# Altium PCB PCB_ECG_Multi_Lead.PcbDoc
Units mil, origin at the board's own origin, x right, y up, seen from the top; angles counter-clockwise.
Board outline 2755.91 x 2362.2 mil, 2 copper layers (Top Layer, Bottom Layer); 218 components, 117 nets, 623 pads, 0 vias.
Unrouted connection lines stored in the file: 460.
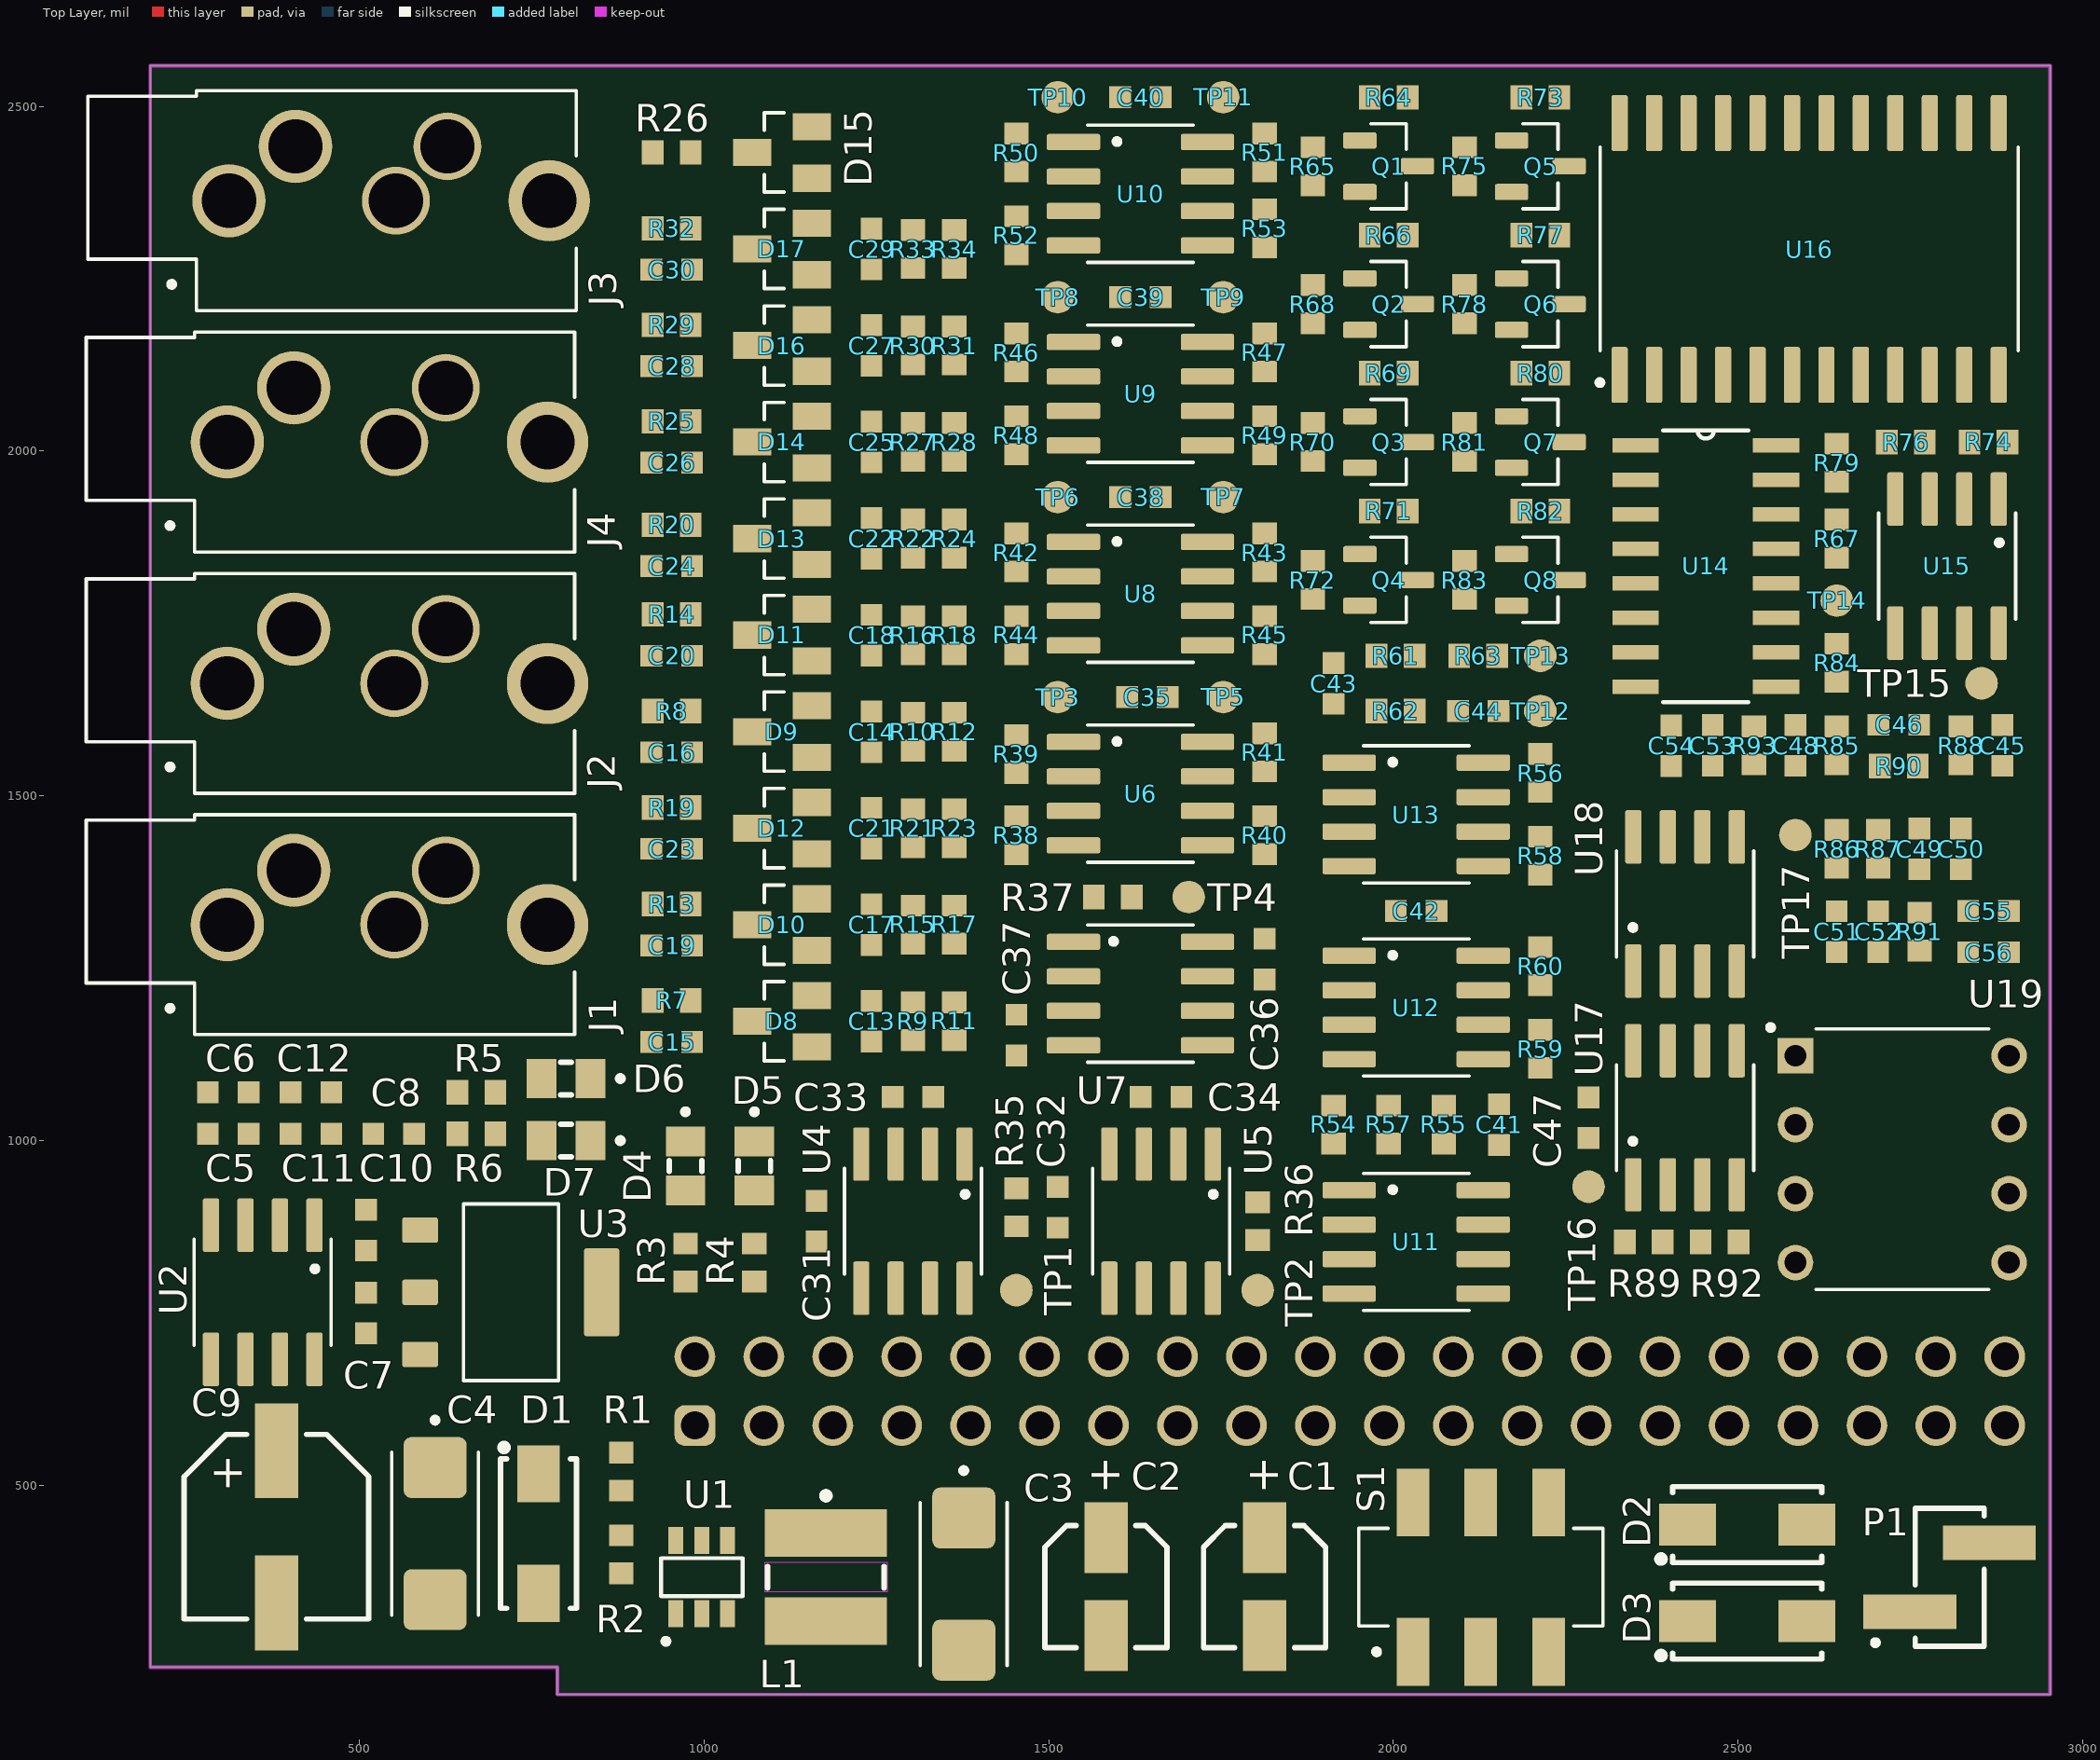
[diagram p0: Top Layer view]
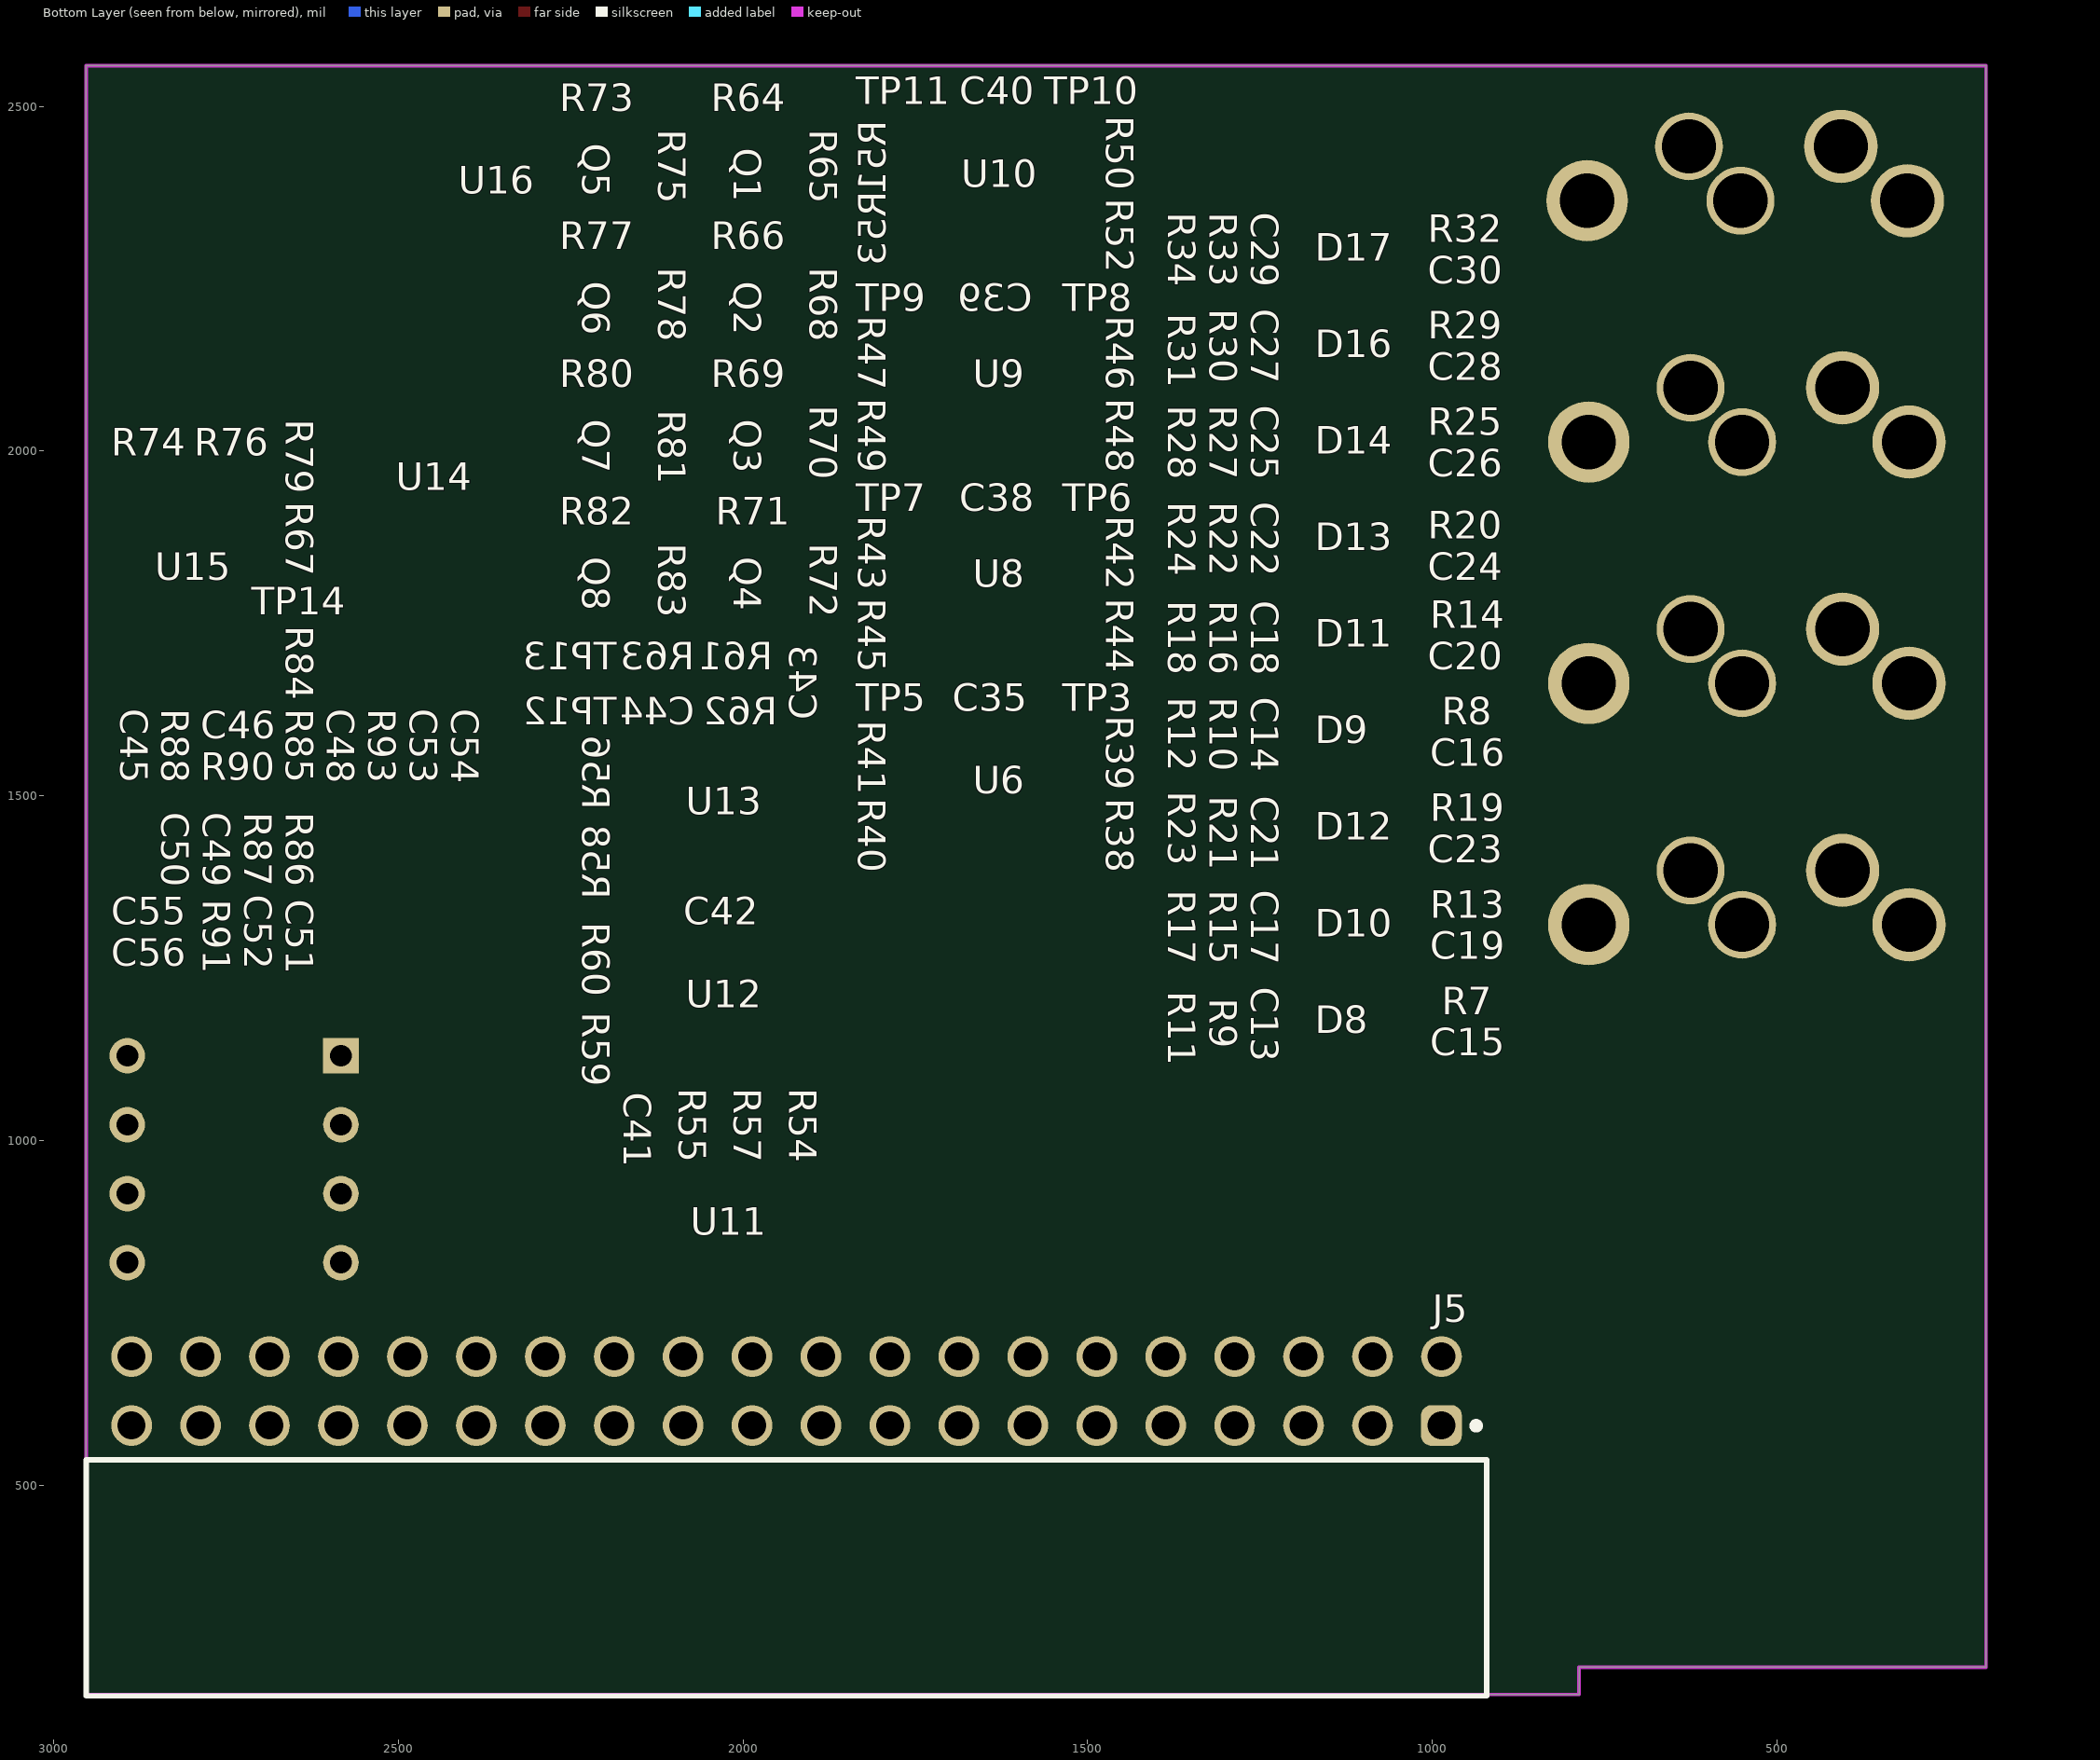
[diagram p1: Bottom Layer view, seen from below]

## Layer stack, top to bottom
Top Solder: solder mask 0.4, Solder Resist, Dk 3.5
Top Layer: signal copper 1.4
Dielectric 1: dielectric 12.6, FR-4, Dk 4.8
Bottom Layer: signal copper 1.4
Bottom Solder: solder mask 0.4, Solder Resist, Dk 3.5

## Board outline
196.85,236.22 196.85,2559.06 2952.76,2559.06 2952.76,196.85 787.4,196.85 787.4,236.22

## Design rules (kind name [scope] priority, off if disabled: settings)
Clearance [All] p1: gap=10 ignorepadtopadclearanceinfootprint=FALSE
PolygonConnect [All] p1: connectstyle=Relief reliefconductorwidth=10 reliefentries=4 polygonreliefangle="90 Angle" airgapwidth=10
RoutingVias [All] p1: holewidth=28 width=50 viastyle="Through Hole" minholewidth=28 minwidth=50 maxholewidth=28 maxwidth=50
SolderMaskExpansion [All] p1: expansion=4 istentingtop=FALSE
SupplyNets "Schematic Supply Nets_5" [InNet('3V5')] p1: voltage=0.000
SupplyNets "Schematic Supply Nets_4" [InNet('GND')] p2: voltage=0.000
SupplyNets "Schematic Supply Nets_2" [InNet('V_POW')] p3: voltage=0.000
SupplyNets "Schematic Supply Nets_1" [InNet('7V')] p4: voltage=0.000
SupplyNets "Schematic Supply Nets" [InNet('3V3')] p5: voltage=0.000
Width [All] p1: maxlimit=10 minlimit=10 preferedwidth=10
30 further rules are at their usual default settings.

## Classes and differential pairs
component class Designator: C13 C14 C15 C16 C17 C18 C19 C20 C21 C22 C23 C24 C25 C26 C27 C28 C29 C30 D8 D9 D10 D11 D12 D13 D14 D15 D16 D17 J1 J2 J3 J4 R7 R8 R9 R10 R11 R12 R13 R14 R15 R16 R17 R18 R19 R20 R21 R22 R23 R24 R25 R26 R27 R28 R29 R30 R31 R32 R33 R34

## Components (designator, comment, footprint, x,y, rotation, side; value= is the part's Value field where it differs from the comment)
C1 "10uF" WCAP-ASLI_D4H5.5 1813.15,353.15 r90 top
C2 "0.1uF" WCAP-ASLI_D4H5.5 1583.15,353.15 r90 top
C3 "10uF" CAPPM6032X280N 1376.85,356.85 r270 top
C4 "10uF" CAPPM6032X280N 610,430 r270 top
C5 "100nF" WCAP-CSGP_0603_L1.6W0.8H0.8_Reflow 310,1010 r180 top
C6 "10uF" WCAP-CSGP_0603_L1.6W0.8H0.8_Reflow 310,1070 r180 top
C7 "10uF" WCAP-CSGP_0603_L1.6W0.8H0.8_Reflow 510,750 r270 top
C8 "10uF" WCAP-CSGP_0603_L1.6W0.8H0.8_Reflow 550,1010 r0 top
C9 "220uF" WCAP-ASLI_D6.3H7.7 380,440 r90 top
C10 "1uF" WCAP-CSGP_0603_L1.6W0.8H0.8_Reflow 510,870 r270 top
C11 "100nF" WCAP-CSGP_0603_L1.6W0.8H0.8_Reflow 430,1010 r180 top
C12 "10uF" WCAP-CSGP_0603_L1.6W0.8H0.8_Reflow 430,1070 r180 top
C13 "4.7uF" WCAP-CSGP_0603_L1.6W0.8H0.8_Reflow 1243.15,1173.15 r90 top
C14 "4.7uF" WCAP-CSGP_0603_L1.6W0.8H0.8_Reflow 1243.15,1592.68 r90 top
C15 "1nF" WCAP-CSGP_0603_L1.6W0.8H0.8_Reflow 953.15,1143.15 r180 top
C16 "1nF" WCAP-CSGP_0603_L1.6W0.8H0.8_Reflow 953.15,1563.15 r180 top
C17 "4.7uF" WCAP-CSGP_0603_L1.6W0.8H0.8_Reflow 1243.15,1313.15 r90 top
C18 "4.7uF" WCAP-CSGP_0603_L1.6W0.8H0.8_Reflow 1243.15,1733.15 r90 top
C19 "1nF" WCAP-CSGP_0603_L1.6W0.8H0.8_Reflow 953.15,1283.15 r180 top
C20 "1nF" WCAP-CSGP_0603_L1.6W0.8H0.8_Reflow 953.15,1703.15 r180 top
C21 "4.7uF" WCAP-CSGP_0603_L1.6W0.8H0.8_Reflow 1243.15,1453.15 r90 top
C22 "4.7uF" WCAP-CSGP_0603_L1.6W0.8H0.8_Reflow 1243.15,1873.15 r90 top
C23 "1nF" WCAP-CSGP_0603_L1.6W0.8H0.8_Reflow 953.15,1423.15 r180 top
C24 "1nF" WCAP-CSGP_0603_L1.6W0.8H0.8_Reflow 953.15,1833.15 r180 top
C25 "4.7uF" WCAP-CSGP_0603_L1.6W0.8H0.8_Reflow 1243.15,2013.15 r90 top
C26 "1nF" WCAP-CSGP_0603_L1.6W0.8H0.8_Reflow 953.15,1983.15 r180 top
C27 "4.7uF" WCAP-CSGP_0603_L1.6W0.8H0.8_Reflow 1243.15,2153.15 r90 top
C28 "1nF" WCAP-CSGP_0603_L1.6W0.8H0.8_Reflow 953.15,2123.15 r180 top
C29 "4.7uF" WCAP-CSGP_0603_L1.6W0.8H0.8_Reflow 1243.15,2293.15 r90 top
C30 "1nF" WCAP-CSGP_0603_L1.6W0.8H0.8_Reflow 953.15,2263.15 r180 top
C31 "100nF" WCAP-CSGP_0603_L1.6W0.8H0.8_Reflow 1163.15,883.15 r90 top
C32 "100nF" WCAP-CSGP_0603_L1.6W0.8H0.8_Reflow 1513.15,903.15 r90 top
C33 "47nF" WCAP-CSGP_0603_L1.6W0.8H0.8_Reflow 1303.15,1063.15 r180 top
C34 "47nF" WCAP-CSGP_0603_L1.6W0.8H0.8_Reflow 1663.15,1063.15 r180 top
C35 "100nF" WCAP-CSGP_0603_L1.6W0.8H0.8_Reflow 1643.15,1643.15 r180 top
C36 "100nF" WCAP-CSGP_0603_L1.6W0.8H0.8_Reflow 1813.15,1263.15 r270 top
C37 "47nF" WCAP-CSGP_0603_L1.6W0.8H0.8_Reflow 1453.15,1153.15 r270 top
C38 "100nF" WCAP-CSGP_0603_L1.6W0.8H0.8_Reflow 1633.15,1933.15 r0 top
C39 "100nF" WCAP-CSGP_0603_L1.6W0.8H0.8_Reflow 1633.15,2223.15 r0 top
C40 "100nF" WCAP-CSGP_0603_L1.6W0.8H0.8_Reflow 1633.15,2513.15 r0 top
C41 "100nF" WCAP-CSGP_0603_L1.6W0.8H0.8_Reflow 2153.15,1023.15 r270 top
C42 "100nF" WCAP-CSGP_0603_L1.6W0.8H0.8_Reflow 2033.15,1333.15 r0 top
C43 "10nF" WCAP-CSGP_0603_L1.6W0.8H0.8_Reflow 1913.15,1663.15 r270 top
C44 "100nF" WCAP-CSGP_0603_L1.6W0.8H0.8_Reflow 2123.15,1623.15 r0 top
C45 "100nF" WCAP-CSGP_0603_L1.6W0.8H0.8_Reflow 2883.15,1573.15 r90 top
C46 "100nF" WCAP-CSGP_0603_L1.6W0.8H0.8_Reflow 2733.15,1603.15 r180 top
C47 "100nF" WCAP-CSGP_0603_L1.6W0.8H0.8_Reflow 2283.15,1033.15 r90 top
C48 "100nF" WCAP-CSGP_0603_L1.6W0.8H0.8_Reflow 2583.15,1573.15 r270 top
C49 "1uF" WCAP-CSGP_0603_L1.6W0.8H0.8_Reflow 2763.15,1423.15 r90 top
C50 "1uF" WCAP-CSGP_0603_L1.6W0.8H0.8_Reflow 2823.15,1423.15 r90 top
C51 "1uF" WCAP-CSGP_0603_L1.6W0.8H0.8_Reflow 2643.15,1303.15 r90 top
C52 "1uF" WCAP-CSGP_0603_L1.6W0.8H0.8_Reflow 2703.15,1303.15 r270 top
C53 "10uF" WCAP-CSGP_0603_L1.6W0.8H0.8_Reflow 2463.15,1573.15 r270 top
C54 "100nF" WCAP-CSGP_0603_L1.6W0.8H0.8_Reflow 2403.15,1572.68 r270 top
C55 "100nF" WCAP-CSGP_0603_L1.6W0.8H0.8_Reflow 2863.15,1333.15 r0 top
C56 "10uF" WCAP-CSGP_0603_L1.6W0.8H0.8_Reflow 2863.15,1273.15 r0 top
D1 "DSchottky" PCBComponent_1 760,430 r90 top
D2 "DSchottky" PCBComponent_1 2513.15,443.15 r180 top
D3 "DSchottky" PCBComponent_1 2513.15,303.15 r180 top
D4 "SML-LXT0805IW-TR" LEDC2012X120N 973.15,963.15 r270 top
D5 "SML-LXT0805IW-TR" LEDC2012X120N 1073.15,963.15 r270 top
D6 "SML-LXT0805IW-TR" LEDC2012X120N 800,1090 r180 top
D7 "SML-LXT0805IW-TR" LEDC2012X120N 800,1000 r180 top
D8 "KDS226" DIO_BAV99 1113.15,1173.15 r180 top
D9 "KDS226" DIO_BAV99 1113.15,1593.15 r180 top
D10 "KDS226" DIO_BAV99 1113.15,1313.15 r180 top
D11 "KDS226" DIO_BAV99 1113.15,1733.15 r180 top
D12 "KDS226" DIO_BAV99 1113.15,1453.15 r180 top
D13 "KDS226" DIO_BAV99 1113.15,1873.15 r180 top
D14 "KDS226" DIO_BAV99 1113.15,2013.15 r180 top
D15 "KDS226" DIO_BAV99 1113.15,2433.15 r180 top
D16 "KDS226" DIO_BAV99 1113.15,2153.15 r180 top
D17 "KDS226" DIO_BAV99 1113.15,2293.15 r180 top
J1 "PJ-324" "3.5 mm, Strereo" 308.58,1313.15 r0 top value=PJ-325
J2 "PJ-324" "3.5 mm, Strereo" 308.58,1663.15 r0 top value=PJ-325
J3 "PJ-324" "3.5 mm, Strereo" 311.02,2363.15 r0 top value=PJ-325
J4 "PJ-324" "3.5 mm, Strereo" 308.58,2013.15 r0 top value=PJ-325
J5 "613040243121" 613040243121 1936.85,365.98 r0 bottom
L1 "3.3uH" WE-PD2A_4532 1176.85,366.85 r270 top
P1 "TSM-102-01-X-SV" SAMTEC_TSM-102-01-X-SV 2806.85,366.85 r270 top
Q1 "BSS138" SOT95P240X111-3N 1993.15,2413.15 r0 top
Q2 "BSS138" SOT95P240X111-3N 1993.15,2213.15 r0 top
Q3 "BSS138" SOT95P240X111-3N 1993.15,2013.15 r0 top
Q4 "BSS138" SOT95P240X111-3N 1993.15,1813.15 r0 top
Q5 "BSS138" SOT95P240X111-3N 2213.15,2413.15 r0 top
Q6 "BSS138" SOT95P240X111-3N 2213.15,2213.15 r0 top
Q7 "BSS138" SOT95P240X111-3N 2213.15,2013.15 r0 top
Q8 "BSS138" SOT95P240X111-3N 2213.15,1813.15 r0 top
R1 "820k" WRIS-PSMB_0603_L1.6W0.8H0.35 880,520 r90 top
R2 "75k" WRIS-PSMB_0603_L1.6W0.8H0.35 880,400 r90 top
R3 "1k" WRIS-PSMB_0603_L1.6W0.8H0.35 973.15,823.15 r270 top
R4 "1k" WRIS-PSMB_0603_L1.6W0.8H0.35 1073.15,823.15 r270 top
R5 "1k" WRIS-PSMB_0603_L1.6W0.8H0.35 670,1070 r180 top
R6 "1k" WRIS-PSMB_0603_L1.6W0.8H0.35 670,1010 r180 top
R7 "220k" WRIS-PSMB_0603_L1.6W0.8H0.35 953.15,1203.15 r180 top
R8 "220k" WRIS-PSMB_0603_L1.6W0.8H0.35 953.15,1623.15 r180 top
R9 "1M" WRIS-PSMB_0603_L1.6W0.8H0.35 1303.15,1173.15 r270 top
R10 "1M" WRIS-PSMB_0603_L1.6W0.8H0.35 1303.15,1593.15 r270 top
R11 "1M" WRIS-PSMB_0603_L1.6W0.8H0.35 1363.15,1173.15 r90 top
R12 "1M" WRIS-PSMB_0603_L1.6W0.8H0.35 1363.15,1593.15 r90 top
R13 "220k" WRIS-PSMB_0603_L1.6W0.8H0.35 953.15,1343.15 r180 top
R14 "220k" WRIS-PSMB_0603_L1.6W0.8H0.35 953.15,1763.15 r180 top
R15 "1M" WRIS-PSMB_0603_L1.6W0.8H0.35 1303.15,1313.15 r270 top
R16 "1M" WRIS-PSMB_0603_L1.6W0.8H0.35 1303.15,1733.15 r270 top
R17 "1M" WRIS-PSMB_0603_L1.6W0.8H0.35 1363.15,1313.15 r90 top
R18 "1M" WRIS-PSMB_0603_L1.6W0.8H0.35 1363.15,1733.15 r90 top
R19 "220k" WRIS-PSMB_0603_L1.6W0.8H0.35 953.15,1483.15 r180 top
R20 "220k" WRIS-PSMB_0603_L1.6W0.8H0.35 953.15,1893.15 r180 top
R21 "1M" WRIS-PSMB_0603_L1.6W0.8H0.35 1303.15,1453.15 r270 top
R22 "1M" WRIS-PSMB_0603_L1.6W0.8H0.35 1303.15,1873.15 r270 top
R23 "1M" WRIS-PSMB_0603_L1.6W0.8H0.35 1363.15,1453.15 r90 top
R24 "1M" WRIS-PSMB_0603_L1.6W0.8H0.35 1363.15,1873.15 r90 top
R25 "220k" WRIS-PSMB_0603_L1.6W0.8H0.35 953.15,2043.15 r180 top
R26 "220k" WRIS-PSMB_0603_L1.6W0.8H0.35 953.15,2433.15 r180 top
R27 "1M" WRIS-PSMB_0603_L1.6W0.8H0.35 1303.15,2013.15 r270 top
R28 "1M" WRIS-PSMB_0603_L1.6W0.8H0.35 1363.15,2013.15 r90 top
R29 "220k" WRIS-PSMB_0603_L1.6W0.8H0.35 953.15,2183.15 r180 top
R30 "1M" WRIS-PSMB_0603_L1.6W0.8H0.35 1303.15,2153.15 r270 top
R31 "1M" WRIS-PSMB_0603_L1.6W0.8H0.35 1363.15,2153.15 r90 top
R32 "220k" WRIS-PSMB_0603_L1.6W0.8H0.35 953.15,2323.15 r180 top
R33 "1M" WRIS-PSMB_0603_L1.6W0.8H0.35 1303.15,2293.15 r270 top
R34 "1M" WRIS-PSMB_0603_L1.6W0.8H0.35 1363.15,2293.15 r90 top
R35 "2k" WRIS-PSMB_0603_L1.6W0.8H0.35 1453.15,903.15 r270 top
R36 "2k" WRIS-PSMB_0603_L1.6W0.8H0.35 1803.15,883.15 r270 top
R37 "2k" WRIS-PSMB_0603_L1.6W0.8H0.35 1593.15,1353.15 r0 top
R38 "50k" WRIS-PSMB_0603_L1.6W0.8H0.35 1453.15,1443.15 r90 top
R39 "100k" WRIS-PSMB_0603_L1.6W0.8H0.35 1453.15,1560.71 r90 top
R40 "50k" WRIS-PSMB_0603_L1.6W0.8H0.35 1813.15,1443.15 r90 top
R41 "100k" WRIS-PSMB_0603_L1.6W0.8H0.35 1813.15,1563.15 r90 top
R42 "100k" WRIS-PSMB_0603_L1.6W0.8H0.35 1453.15,1853.15 r90 top
R43 "100k" WRIS-PSMB_0603_L1.6W0.8H0.35 1813.15,1853.15 r90 top
R44 "2k" WRIS-PSMB_0603_L1.6W0.8H0.35 1453.15,1733.15 r90 top
R45 "2k" WRIS-PSMB_0603_L1.6W0.8H0.35 1813.15,1733.15 r90 top
R46 "100k" WRIS-PSMB_0603_L1.6W0.8H0.35 1453.15,2143.15 r90 top
R47 "100k" WRIS-PSMB_0603_L1.6W0.8H0.35 1813.15,2143.15 r90 top
R48 "2k" WRIS-PSMB_0603_L1.6W0.8H0.35 1453.15,2023.15 r90 top
R49 "2k" WRIS-PSMB_0603_L1.6W0.8H0.35 1813.15,2023.15 r90 top
R50 "100k" WRIS-PSMB_0603_L1.6W0.8H0.35 1453.15,2433.15 r90 top
R51 "100k" WRIS-PSMB_0603_L1.6W0.8H0.35 1813.15,2433.15 r90 top
R52 "2k" WRIS-PSMB_0603_L1.6W0.8H0.35 1453.15,2313.15 r90 top
R53 "2k" WRIS-PSMB_0603_L1.6W0.8H0.35 1813.15,2323.15 r90 top
R54 "100k" WRIS-PSMB_0603_L1.6W0.8H0.35 1913.15,1023.15 r90 top
R55 "100k" WRIS-PSMB_0603_L1.6W0.8H0.35 2073.15,1023.15 r90 top
R56 "100k" WRIS-PSMB_0603_L1.6W0.8H0.35 2213.15,1533.15 r90 top
R57 "100k" WRIS-PSMB_0603_L1.6W0.8H0.35 1993.15,1023.15 r270 top
R58 "20k" WRIS-PSMB_0603_L1.6W0.8H0.35 2213.15,1413.15 r90 top
R59 "20k" WRIS-PSMB_0603_L1.6W0.8H0.35 2213.15,1133.15 r90 top
R60 "180k" WRIS-PSMB_0603_L1.6W0.8H0.35 2213.15,1253.15 r90 top
R61 "10k" WRIS-PSMB_0603_L1.6W0.8H0.35 2003.15,1703.15 r180 top
R62 "1M" WRIS-PSMB_0603_L1.6W0.8H0.35 2003.15,1623.15 r180 top
R63 "120k" WRIS-PSMB_0603_L1.6W0.8H0.35 2123.15,1703.15 r0 top
R64 "10k" WRIS-PSMB_0603_L1.6W0.8H0.35 1993.15,2513.15 r180 top
R65 "10k" WRIS-PSMB_0603_L1.6W0.8H0.35 1883.15,2413.15 r90 top
R66 "10k" WRIS-PSMB_0603_L1.6W0.8H0.35 1993.15,2313.15 r180 top
R67 "100k" WRIS-PSMB_0603_L1.6W0.8H0.35 2643.15,1873.15 r90 top
R68 "10k" WRIS-PSMB_0603_L1.6W0.8H0.35 1883.15,2213.15 r90 top
R69 "10k" WRIS-PSMB_0603_L1.6W0.8H0.35 1993.15,2113.15 r180 top
R70 "10k" WRIS-PSMB_0603_L1.6W0.8H0.35 1883.15,2013.15 r90 top
R71 "10k" WRIS-PSMB_0603_L1.6W0.8H0.35 1993.15,1913.15 r180 top
R72 "10k" WRIS-PSMB_0603_L1.6W0.8H0.35 1883.15,1813.15 r90 top
R73 "10k" WRIS-PSMB_0603_L1.6W0.8H0.35 2213.15,2513.15 r180 top
R74 "10k" WRIS-PSMB_0603_L1.6W0.8H0.35 2863.15,2013.15 r0 top
R75 "10k" WRIS-PSMB_0603_L1.6W0.8H0.35 2103.15,2413.15 r90 top
R76 "10k" WRIS-PSMB_0603_L1.6W0.8H0.35 2743.15,2013.15 r0 top
R77 "10k" WRIS-PSMB_0603_L1.6W0.8H0.35 2213.15,2313.15 r180 top
R78 "10k" WRIS-PSMB_0603_L1.6W0.8H0.35 2103.15,2213.15 r90 top
R79 "100k" WRIS-PSMB_0603_L1.6W0.8H0.35 2643.15,1983.15 r270 top
R80 "10k" WRIS-PSMB_0603_L1.6W0.8H0.35 2213.15,2113.15 r180 top
R81 "10k" WRIS-PSMB_0603_L1.6W0.8H0.35 2103.15,2013.15 r90 top
R82 "10k" WRIS-PSMB_0603_L1.6W0.8H0.35 2213.15,1913.15 r180 top
R83 "10k" WRIS-PSMB_0603_L1.6W0.8H0.35 2103.15,1813.15 r90 top
R84 "270k" WRIS-PSMB_0603_L1.6W0.8H0.35 2643.15,1693.15 r270 top
R85 "100k" WRIS-PSMB_0603_L1.6W0.8H0.35 2643.15,1573.15 r270 top
R86 "3k" WRIS-PSMB_0603_L1.6W0.8H0.35 2643.15,1423.15 r270 top
R87 "3k" WRIS-PSMB_0603_L1.6W0.8H0.35 2703.15,1423.15 r90 top
R88 "200k" WRIS-PSMB_0603_L1.6W0.8H0.35 2823.15,1573.15 r270 top
R89 "6.8k" WRIS-PSMB_0603_L1.6W0.8H0.35 2363.15,853.15 r0 top
R90 "20k" WRIS-PSMB_0603_L1.6W0.8H0.35 2733.15,1543.15 r180 top
R91 "1.5k" WRIS-PSMB_0603_L1.6W0.8H0.35 2763.15,1303.15 r90 top
R92 "10k" WRIS-PSMB_0603_L1.6W0.8H0.35 2473.15,853.15 r0 top
R93 "1M" WRIS-PSMB_0603_L1.6W0.8H0.35 2523.15,1573.15 r90 top
S1 "JS202011SCQN" SW_JS202011SCQN 2126.85,366.85 r0 top
TP1 "Pad_Test_Point" Pad_Test_Point 1453.15,783.15 r0 top
TP2 "Pad_Test_Point" Pad_Test_Point 1803.15,783.15 r0 top
TP3 "Pad_Test_Point" Pad_Test_Point 1513.15,1643.15 r90 top
TP4 "Pad_Test_Point" Pad_Test_Point 1703.15,1353.15 r90 top
TP5 "Pad_Test_Point" Pad_Test_Point 1753.15,1643.15 r90 top
TP6 "Pad_Test_Point" Pad_Test_Point 1513.15,1933.15 r90 top
TP7 "Pad_Test_Point" Pad_Test_Point 1753.15,1933.15 r90 top
TP8 "Pad_Test_Point" Pad_Test_Point 1513.15,2223.15 r90 top
TP9 "Pad_Test_Point" Pad_Test_Point 1753.15,2223.15 r90 top
TP10 "Pad_Test_Point" Pad_Test_Point 1513.15,2513.15 r90 top
TP11 "Pad_Test_Point" Pad_Test_Point 1753.15,2513.15 r90 top
TP12 "Pad_Test_Point" Pad_Test_Point 2213.15,1623.15 r90 top
TP13 "Pad_Test_Point" Pad_Test_Point 2213.15,1703.15 r90 top
TP14 "Pad_Test_Point" Pad_Test_Point 2643.15,1783.15 r90 top
TP15 "Pad_Test_Point" Pad_Test_Point 2853.15,1663.15 r90 top
TP16 "Pad_Test_Point" Pad_Test_Point 2283.15,933.15 r90 top
TP17 "Pad_Test_Point" Pad_Test_Point 2583.15,1443.15 r90 top
U1 "SX1308" SOT-23-6 996.85,366.85 r90 top
U2 "TLE2426" SO8 360,780 r270 top
U3 "AMS1117-3.3" SOT229P700X180-4N 720,780 r270 top
U4 "INA128UA" SOIC127P599X175-8N 1303.15,883.15 r270 top
U5 "INA128UA" SOIC127P599X175-8N 1663.15,883.15 r270 top
U6 "OPA2277UA" SOIC127P599X175-8N 1633.15,1503.15 r0 top
U7 "INA128UA" SOIC127P599X175-8N 1633.15,1213.15 r0 top
U8 "OPA2277UA" SOIC127P599X175-8N 1633.15,1793.15 r0 top
U9 "OPA2277UA" SOIC127P599X175-8N 1633.15,2083.15 r0 top
U10 "OPA2277UA" SOIC127P599X175-8N 1633.15,2373.15 r0 top
U11 "OPA2277UA" SOIC127P599X175-8N 2033.15,853.15 r0 top
U12 "OPA2277UA" SOIC127P599X175-8N 2033.15,1193.15 r0 top
U13 "OPA2277UA" SOIC127P599X175-8N 2033.15,1473.15 r0 top
U14 "74HC4052D" SOIC127P600X175-16N 2453.15,1833.15 r0 top
U15 "OPA2277UA" SOIC127P599X175-8N 2803.15,1833.15 r270 top
U16 "CD4067BM" SOIC127P1030X265-24N 2603.15,2293.15 r90 top
U17 "OPA2277UA" SOIC127P599X175-8N 2423.15,1033.15 r90 top
U18 "OPA2277UA" SOIC127P599X175-8N 2423.15,1343.15 r90 top
U19 "MCP3202-BI/P" DIP787W46P254L927H533Q8 2738.07,973.15 r0 top

## Footprints (in the part's own frame and the unit in brackets; to place one, negate y for a bottom-side part, rotate by r counter-clockwise, add the part's x,y. Pads: shape width x height; smd on the part's side, far side on the other; paste and mask are expansions set on the pad)
"3.5 mm, Strereo" [mm]
  round 2.7 hole 2: 1(0,0) 2(2.45,2)
  round 2.5 hole 2: 3(6.15,0) 4(8.05,2)
  round 3 hole 2: 5(11.8,0)
  silkscreen extent -5.2,-4.05 12.8,4.05
613040243121 [mm] "Socket Header, Pitch 2.54 mm, THT, Angled, dual row, 40p"
  rrect50% 1.5x1.5 hole 1.03: 1(-24.13,-5.61)
  round 1.5 hole 1.03: 2(-24.13,-8.15) 3(-21.59,-5.61) 4(-21.59,-8.15) 5(-19.05,-5.61) 6(-19.05,-8.15) 7(-16.51,-5.61) 8(-16.51,-8.15) 9(-13.97,-5.61) 10(-13.97,-8.15) 11(-11.43,-5.61) 12(-11.43,-8.15) 13(-8.89,-5.61) 14(-8.89,-8.15) 15(-6.35,-5.61) 16(-6.35,-8.15) 17(-3.81,-5.61) 18(-3.81,-8.15) 19(-1.27,-5.61) 20(-1.27,-8.15) 21(1.27,-5.61) 22(1.27,-8.15) 23(3.81,-5.61) 24(3.81,-8.15) 25(6.35,-5.61) 26(6.35,-8.15) 27(8.89,-5.61) 28(8.89,-8.15) 29(11.43,-5.61) 30(11.43,-8.15) 31(13.97,-5.61) 32(13.97,-8.15) 33(16.51,-5.61) 34(16.51,-8.15) 35(19.05,-5.61) 36(19.05,-8.15) 37(21.59,-5.61) 38(21.59,-8.15) 39(24.13,-5.61) 40(24.13,-8.15)
  silkscreen extent -25.8,-5.72 25.8,4.35, body extent -25.65,-8.35 25.65,4.25, height 5.05
CAPPM6032X280N [mm]
  rrect25% 2.24x2.32 smd: 1(-2.435,0) 2(2.435,0)
  silkscreen extent -4.28,-1.6 3,1.6, body extent -3,-1.6 3,1.6, height 2.8
DIO_BAV99 [mm]
  rect 1.4x1 smd: 1(-1.1,-0.95) 2(-1.1,0.95) 3(1.1,0)
  silkscreen extent -0.08,-1.46 0.65,1.46, body extent -1.2,-1.46 1.2,1.46, height 1.2
DIP787W46P254L927H533Q8 [mm]
  rect 1.308x1.308 hole 0.8: 1(-3.935,3.81)
  round 1.308 hole 0.8: 2(-3.935,1.27) 3(-3.935,-1.27) 4(-3.935,-3.81) 5(3.935,-3.81) 6(3.935,-1.27) 7(3.935,1.27) 8(3.935,3.81)
  silkscreen extent -4.95,-4.8 3.18,4.95, body extent -3.94,-4.64 3.94,4.64, height 5.4
LEDC2012X120N [mm]
  rect 1.1x1.45 smd: A(0.9,0) C(-0.9,0)
  silkscreen extent -2.1,-0.6 0.2,0.6, body extent -1,-0.65 1,0.65, height 0.9
Pad_Test_Point [mm]
  round 1.2 smd: 1(0,0)
PCBComponent_1 [mm]
  rect 2.1x1.55 smd: 1(-2.2,0) 2(2.2,0)
  silkscreen extent -2.75,-1.4 3.3,1.4, body extent -2.75,-1.4 2.75,1.4, height 2.3
SAMTEC_TSM-102-01-X-SV [mm]
  rect 1.27x3.43 smd: 1(1.27,-1.46) 2(-1.27,1.46)
  silkscreen extent -2.54,-2.83 2.54,1.27, body extent -2.54,-2.64 2.54,2.64, height 9.68
SO8 [mm]
  rrect25% 1.97x0.6 smd: 1(-2.47,1.905) 2(-2.47,0.635) 3(-2.47,-0.635) 4(-2.47,-1.905) 5(2.47,-1.905) 6(2.47,-0.635) 7(2.47,0.635) 8(2.47,1.905)
  silkscreen extent -1.95,-2.52 1.95,2.52, body extent -2.95,-2.45 2.95,2.45, height 1.5
SOIC127P599X175-8N [mm]
  rrect25% 1.97x0.6 smd: 1(-2.47,1.905) 2(-2.47,0.635) 3(-2.47,-0.635) 4(-2.47,-1.905) 5(2.47,-1.905) 6(2.47,-0.635) 7(2.47,0.635) 8(2.47,1.905)
  silkscreen extent -1.95,-2.52 1.95,2.52, body extent -3,-2.45 3,2.45, height 1.75
SOIC127P600X175-16N [mil]
  rect 67x21 smd: 1(-102,175) 2(-102,125) 3(-102,75) 4(-102,25) 5(-102,-25) 6(-102,-75) 7(-102,-125) 8(-102,-175) 9(102,-175) 10(102,-125) 11(102,-75) 12(102,-25) 13(102,25) 14(102,75) 15(102,125) 16(102,175)
  silkscreen extent -62,-197 62,197, body extent -118,-195 118,195, height 69
SOIC127P1030X265-24N [mm]
  rrect25% 2.06x0.6 smd: 1(-4.64,6.985) 2(-4.64,5.715) 3(-4.64,4.445) 4(-4.64,3.175) 5(-4.64,1.905) 6(-4.64,0.635) 7(-4.64,-0.635) 8(-4.64,-1.905) 9(-4.64,-3.175) 10(-4.64,-4.445) 11(-4.64,-5.715) 12(-4.64,-6.985) 13(4.64,-6.985) 14(4.64,-5.715) 15(4.64,-4.445) 16(4.64,-3.175) 17(4.64,-1.905) 18(4.64,-0.635) 19(4.64,0.635) 20(4.64,1.905) 21(4.64,3.175) 22(4.64,4.445) 23(4.64,5.715) 24(4.64,6.985)
  silkscreen extent -5.02,-7.7 3.75,7.81, body extent -5.15,-7.7 5.15,7.7, height 2.65
SOT95P240X111-3N [mm]
  rrect25% 1.23x0.6 smd: 1(-1.06,0.95) 2(-1.06,-0.95) 3(1.06,0)
  silkscreen extent -0.65,-1.57 0.65,1.57, body extent -1.2,-1.45 1.2,1.45, height 1.11
SOT229P700X180-4N [mm]
  rrect15% 0.93x1.31 smd: 1(-2.29,-3.345) 2(0,-3.345) 3(2.29,-3.345)
  rrect15% 3.24x1.31 smd: 4(0,3.345)
  silkscreen extent -3.25,-1.75 3.25,1.75, body extent -3.25,-3.5 3.25,3.5, height 1.8
SOT-23-6 [mm]
  rect 1x0.55 smd: 1(-1.35,0.95) 2(-1.35,0) 3(-1.35,-0.95) 4(1.35,-0.95) 5(1.35,0) 6(1.35,0.95)
  silkscreen extent -2.46,-1.5 0.7,1.5
SW_JS202011SCQN [mm]
  rect 1.2x2.5 smd: 1(-2.5,-2.75) 2(0,-2.75) 3(2.5,-2.75) 4(2.5,2.75) 5(0,2.75) 6(-2.5,2.75)
  silkscreen extent -4.5,-2.85 4.5,1.8, body extent -4.5,-3.75 4.5,3.75, height 5.51
WCAP-ASLI_D4H5.5 [mm] "Aluminium Electrolytic V-Chip SMT Capacitors, 4x5.5mm"
  rect 2.6x1.6 smd: 1(1.8,0) 2(-1.8,0)
  silkscreen extent -2.25,-2.25 2.25,2.25, body extent -2.5,-2.15 2.5,2.15, height 5.5
WCAP-ASLI_D6.3H7.7 [mm] "Aluminium Electrolytic V-Chip SMT Capacitors, 6.3x7.7mm"
  rect 3.5x1.6 smd: 1(2.8,0) 2(-2.8,0)
  silkscreen extent -3.4,-3.4 3.4,3.4, body extent -3.65,-3.3 3.65,3.3, height 7.7
WCAP-CSGP_0603_L1.6W0.8H0.8_Reflow [mm] "Ceramic Capacitors, body 1.6x0.8mm"
  rect 0.8x0.8 smd: 1(-0.75,0) 2(0.75,0)
  body extent -0.8,-0.4 0.8,0.4, height 0.8
WE-PD2A_4532 [mm] "SMD Power Inductor, body 4.5x4mm"
  rect 1.75x4.5 smd: 1(-1.625,0) 2(1.625,0)
  Top Layer keep-out region: -0.55,2.25 0.55,2.25 0.55,-2.25 -0.55,-2.25
  silkscreen extent -3.12,-2.15 0.4,2.15, body extent -2.16,-2 2.16,2, height 3.2
WRIS-PSMB_0603_L1.6W0.8H0.35 [mm] "Metal Plate Resistor, SMT, body size 1.6x0.8mm"
  rect 0.8x0.9 smd: 1(-0.7,0) 2(0.7,0)
  body extent -0.8,-0.4 0.8,0.4, height 0.35

## Part data
C1: library part 865080440002, "WCAP-ASLI Aluminum Electrolytic Capacitor, V-Chip, D4 x H5.5mm, 10uF, 25V", Capacitance Tolerance=+/-20%, Leakage Current=3uA, Manufacturer="Wurth Elektronik", Operating Temperature Max=105°C, Operating Temperature Min=-55°C, Rated Voltage (DC)=25V, Ripple Current=85mA, Capacitance=10uF, Category="Aluminum Electrolytic Capacitors", ComponentLink1Description="Website Link", ComponentLink1URL=https://www.we-online.com/redexpert/article/865080440002?ad, ComponentLink2Description="Datasheet Link", ComponentLink2URL=https://www.we-online.com/redexpert/spec/865080440002?ad, Diameter=4mm, Dissipation Factor=14%, Endurance=2000h, Height=5.5mm, Manufacturer Part Number=865080440002, Match Code=WCAP-ASLI, Mount="Surface Mount", Packaging="Tape and Reel", Technical Reference=ASEB055100M025DVCTAB000
C2: library part 865080740002, "WCAP-ASLI Aluminum Electrolytic Capacitor, V-Chip, D4 x H5.5mm, 0.1uF, 63V", Capacitance Tolerance=+/-20%, Leakage Current=3uA, Manufacturer="Wurth Elektronik", Operating Temperature Max=105°C, Operating Temperature Min=-55°C, Rated Voltage (DC)=63V, Ripple Current=1mA, Capacitance=0.1uF, Category="Aluminum Electrolytic Capacitors", ComponentLink1Description="Website Link", ComponentLink1URL=https://www.we-online.com/redexpert/article/865080740002?ad, ComponentLink2Description="Datasheet Link", ComponentLink2URL=https://www.we-online.com/redexpert/spec/865080740002?ad, Diameter=4mm, Dissipation Factor=12%, Endurance=2000h, Height=5.5mm, Manufacturer Part Number=865080740002, Match Code=WCAP-ASLI, Mount="Surface Mount", Packaging="Tape and Reel", Technical Reference=ASEB055R10M063DVCTAB000
C3 C4: library part TAJC106K016RNJ, "10µF Molded Tantalum Capacitors 16V 2312 (6032 Metric) 2Ohm", Package="2312 AVX Interconnect / Elco", Availability=Unavailable, Check_prices=https://www.snapeda.com/parts/TAJC106K016RNJ/AVX%20Interconnect%20/%20Elco/view-part/4773/?ref=eda, MF="AVX Interconnect / Elco", MP=TAJC106K016RNJ, Price=None, SnapEDA_Link=https://www.snapeda.com/parts/TAJC106K016RNJ/AVX%20Interconnect%20/%20Elco/view-part/4773/?ref=snap
C5 C11 C31 C32 C35 C36 C38 C39 C40 C41 C42 C44 C45 C46 C48 C54 C55: library part 885012206095, "WCAP-CSGP Multilayer Ceramic Chip Capacitor, General Purpose, size 0603, X7R, 100nF, 50VDC", Capacitance Tolerance=+/-10%, Case/Size Code=0603, Insulation Resistance=5GOhm, Manufacturer="Wurth Elektronik", Operating Temperature Max=125°C, Operating Temperature Min=-55°C, Rated Voltage (DC)=50V, Capacitance=100nF, Category="Multilayer Ceramic Chip Capacitors", Ceramic Type=X7R, ComponentLink1Description="Website Link", ComponentLink1URL=https://www.we-online.com/redexpert/article/885012206095?ad, ComponentLink2Description="Datasheet Link", ComponentLink2URL=https://www.we-online.com/redexpert/spec/885012206095?ad, Dissipation Factor=3%, Height=0.8mm, Length=1.6mm, Manufacturer Part Number=885012206095, Match Code=WCAP-CSGP, Mount="Surface Mount", Packaging="Tape and Reel", Technical Reference=X7R0603104K050DFCT10000, Width=0.8mm
C6 C7 C8 C12 C53 C56: library part 885012106031, "WCAP-CSGP Multilayer Ceramic Chip Capacitor, General Purpose, size 0603, X5R, 10uF, 25VDC", Capacitance Tolerance=+/20%, Case/Size Code=0603, Insulation Resistance=0.01GOhm, Manufacturer="Wurth Elektronik", Operating Temperature Max=85°C, Operating Temperature Min=-55°C, Rated Voltage (DC)=25V, Capacitance=10uF, Category="Multilayer Ceramic Chip Capacitors", Ceramic Type=X5R, ComponentLink1Description="Website Link", ComponentLink1URL=https://www.we-online.com/redexpert/article/885012106031?ad, ComponentLink2Description="Datasheet Link", ComponentLink2URL=https://www.we-online.com/redexpert/spec/885012106031?ad, Dissipation Factor=20%, Height=0.8mm, Length=1.6mm, Manufacturer Part Number=885012106031, Match Code=WCAP-CSGP, Mount="Surface Mount", Packaging="Tape and Reel", Technical Reference=X5R0603106M025DFCT10000, Width=0.8mm
C9: library part 865080245009, "WCAP-ASLI Aluminum Electrolytic Capacitor, V-Chip, D6.3 x H7.7mm, 220uF, 10V", Capacitance Tolerance=+/-20%, Leakage Current=22uA, Manufacturer="Wurth Elektronik", Operating Temperature Max=105°C, Operating Temperature Min=-55°C, Rated Voltage (DC)=10V, Ripple Current=270mA, Capacitance=220uF, Category="Aluminum Electrolytic Capacitors", ComponentLink1Description="Website Link", ComponentLink1URL=https://www.we-online.com/redexpert/article/865080245009?ad, ComponentLink2Description="Datasheet Link", ComponentLink2URL=https://www.we-online.com/redexpert/spec/865080245009?ad, Diameter=6.3mm, Dissipation Factor=19%, Endurance=2000h, Height=7.7mm, Manufacturer Part Number=865080245009, Match Code=WCAP-ASLI, Mount="Surface Mount", Packaging="Tape and Reel", Technical Reference=ASED077221M010DVCTCB000
C10: library part 885012206126, "WCAP-CSGP Multilayer Ceramic Chip Capacitor, General Purpose, size 0603, X7R, 1uF, 50VDC", Capacitance Tolerance=+/-10%, Case/Size Code=0603, Insulation Resistance=0.5GOhm, Manufacturer="Wurth Elektronik", Operating Temperature Max=125°C, Operating Temperature Min=-55°C, Rated Voltage (DC)=50V, Capacitance=1uF, Category="Multilayer Ceramic Chip Capacitors", Ceramic Type=X7R, ComponentLink1Description="Website Link", ComponentLink1URL=https://www.we-online.com/redexpert/article/885012206126?ad, ComponentLink2Description="Datasheet Link", ComponentLink2URL=https://www.we-online.com/redexpert/spec/885012206126?ad, Dissipation Factor=10%, Height=0.8mm, Length=1.6mm, Manufacturer Part Number=885012206126, Match Code=WCAP-CSGP, Mount="Surface Mount", Packaging="Tape and Reel", Technical Reference=X7R0603105K050DFCT10000, Width=0.8mm
C13 C14 C17 C18 C21 C22 C25 C27 C29: library part 885012106012, "WCAP-CSGP Multilayer Ceramic Chip Capacitor, General Purpose, size 0603, X5R, 4.7uF, 10VDC", Capacitance Tolerance=+/-20%, Case/Size Code=0603, Insulation Resistance=0.02GOhm, Manufacturer="Wurth Elektronik", Operating Temperature Max=85°C, Operating Temperature Min=-55°C, Rated Voltage (DC)=10V, Capacitance=4.7uF, Category="Multilayer Ceramic Chip Capacitors", Ceramic Type=X5R, ComponentLink1Description="Website Link", ComponentLink1URL=https://www.we-online.com/redexpert/article/885012106012?ad, ComponentLink2Description="Datasheet Link", ComponentLink2URL=https://www.we-online.com/redexpert/spec/885012106012?ad, Dissipation Factor=10%, Height=0.8mm, Length=1.6mm, Manufacturer Part Number=885012106012, Match Code=WCAP-CSGP, Mount="Surface Mount", Packaging="Tape and Reel", Technical Reference=X5R0603475M010DFCT10000, Width=0.8mm
C15 C16 C19 C20 C23 C24 C26 C28 C30: library part 885012006063, "WCAP-CSGP Multilayer Ceramic Chip Capacitor, General Purpose, size 0603, NP0, 1nF, 50VDC", Capacitance Tolerance=+/-5%, Case/Size Code=0603, Insulation Resistance=10GOhm, Manufacturer="Wurth Elektronik", Operating Temperature Max=125°C, Operating Temperature Min=-55°C, Rated Voltage (DC)=50V, Capacitance=1nF, Category="Multilayer Ceramic Chip Capacitors", Ceramic Type=NP0, ComponentLink1Description="Website Link", ComponentLink1URL=https://www.we-online.com/redexpert/article/885012006063?ad, ComponentLink2Description="Datasheet Link", ComponentLink2URL=https://www.we-online.com/redexpert/spec/885012006063?ad, Height=0.8mm, Length=1.6mm, Manufacturer Part Number=885012006063, Match Code=WCAP-CSGP, Mount="Surface Mount", Packaging="Tape and Reel", Q Factor=1000, Technical Reference=NP00603102J050DFCT10000, Width=0.8mm
C33 C34 C37: library part 885012206093, "WCAP-CSGP Multilayer Ceramic Chip Capacitor, General Purpose, size 0603, X7R, 47nF, 50VDC", Capacitance Tolerance=+/-10%, Case/Size Code=0603, Insulation Resistance=10GOhm, Manufacturer="Wurth Elektronik", Operating Temperature Max=125°C, Operating Temperature Min=-55°C, Rated Voltage (DC)=50V, Capacitance=47nF, Category="Multilayer Ceramic Chip Capacitors", Ceramic Type=X7R, ComponentLink1Description="Website Link", ComponentLink1URL=https://www.we-online.com/redexpert/article/885012206093?ad, ComponentLink2Description="Datasheet Link", ComponentLink2URL=https://www.we-online.com/redexpert/spec/885012206093?ad, Dissipation Factor=3%, Height=0.8mm, Length=1.6mm, Manufacturer Part Number=885012206093, Match Code=WCAP-CSGP, Mount="Surface Mount", Packaging="Tape and Reel", Technical Reference=X7R0603473K050DFCT10000, Width=0.8mm
C43: library part 885012206089, "WCAP-CSGP Multilayer Ceramic Chip Capacitor, General Purpose, size 0603, X7R, 10nF, 50VDC", Capacitance Tolerance=+/-10%, Case/Size Code=0603, Insulation Resistance=10GOhm, Manufacturer="Wurth Elektronik", Operating Temperature Max=125°C, Operating Temperature Min=-55°C, Rated Voltage (DC)=50V, Capacitance=10nF, Category="Multilayer Ceramic Chip Capacitors", Ceramic Type=X7R, ComponentLink1Description="Website Link", ComponentLink1URL=https://www.we-online.com/redexpert/article/885012206089?ad, ComponentLink2Description="Datasheet Link", ComponentLink2URL=https://www.we-online.com/redexpert/spec/885012206089?ad, Dissipation Factor=2.5%, Height=0.8mm, Length=1.6mm, Manufacturer Part Number=885012206089, Match Code=WCAP-CSGP, Mount="Surface Mount", Packaging="Tape and Reel", Technical Reference=X7R0603103K050DFCT10000, Width=0.8mm
C47: library part 885012206046, "WCAP-CSGP Multilayer Ceramic Chip Capacitor, General Purpose, size 0603, X7R, 100nF, 16VDC", Capacitance Tolerance=+/-10%, Case/Size Code=0603, Insulation Resistance=5GOhm, Manufacturer="Wurth Elektronik", Operating Temperature Max=125°C, Operating Temperature Min=-55°C, Rated Voltage (DC)=16V, Capacitance=100nF, Category="Multilayer Ceramic Chip Capacitors", Ceramic Type=X7R, ComponentLink1Description="Website Link", ComponentLink1URL=https://www.we-online.com/redexpert/article/885012206046?ad, ComponentLink2Description="Datasheet Link", ComponentLink2URL=https://www.we-online.com/redexpert/spec/885012206046?ad, Dissipation Factor=3.5%, Height=0.8mm, Length=1.6mm, Manufacturer Part Number=885012206046, Match Code=WCAP-CSGP, Mount="Surface Mount", Packaging="Tape and Reel", Technical Reference=X7R0603104K016DFCT10000, Width=0.8mm
C49 C50 C51 C52: library part 885012106022, "WCAP-CSGP Multilayer Ceramic Chip Capacitor, General Purpose, size 0603, X5R, 1uF, 25VDC", Capacitance Tolerance=+/-20%, Case/Size Code=0603, Insulation Resistance=0.5GOhm, Manufacturer="Wurth Elektronik", Operating Temperature Max=85°C, Operating Temperature Min=-55°C, Rated Voltage (DC)=25V, Capacitance=1uF, Category="Multilayer Ceramic Chip Capacitors", Ceramic Type=X5R, ComponentLink1Description="Website Link", ComponentLink1URL=https://www.we-online.com/redexpert/article/885012106022?ad, ComponentLink2Description="Datasheet Link", ComponentLink2URL=https://www.we-online.com/redexpert/spec/885012106022?ad, Dissipation Factor=10%, Height=0.8mm, Length=1.6mm, Manufacturer Part Number=885012106022, Match Code=WCAP-CSGP, Mount="Surface Mount", Packaging="Tape and Reel", Technical Reference=X5R0603105M025DFCT10000, Width=0.8mm
D4 D5 D6 D7: "LED;Red;11mcd;0.061In.Dia.;SMD;100mA;2V Vf;635nm;140deg;SMD;White Diffused;5V Vr", Package="0805 Lumex", Check_prices=https://www.snapeda.com/parts/SML-LXT0805IW-TR/Lumex+Opto%252FComponents+Inc./view-part/?ref=eda, MF="Lumex Opto/Components", MP=SML-LXT0805IW-TR, SnapEDA_Link=https://www.snapeda.com/parts/SML-LXT0805IW-TR/Lumex+Opto%252FComponents+Inc./view-part/?ref=snap
D8 D9 D10 D11 D12 D13 D14 D15 D16 D17: "Diode Array 1 Pair Series Connection Standard 100V 215mA (DC) Surface Mount TO-236-3, SC-59, SOT-23-3", Package="SOT-23-3 Motorola", Availability="In Stock", Check_prices=https://www.snapeda.com/parts/BAV99/Onsemi/view-part/?ref=eda, MF="ON Semiconductor", MP=BAV99, Price=None, Purchase-URL=https://pricing.snapeda.com/search/part/BAV99/?ref=eda, SnapEDA_Link=https://www.snapeda.com/parts/BAV99/Onsemi/view-part/?ref=snap
J1 J2 J3 J4: "Jack 3.5 3-Pole 5-Pin", ComponentLink1Description=Buy, ComponentLink1URL=https://www.thegioiic.com/pj-324-cong-audio-3-5mm-3-cuc-5-chan-han-pcb
J5: "WR-PHD Socket Header, THT, Angled, pitch 2.54mm, 2 Row, 40P", Contact Resistance=20mOhm, Manufacturer="Wurth Elektronik", Operating Temperature Max=125°C, Operating Temperature Min=-40°C, Rated Current=3A, Withstanding Voltage=500V, Working Voltage=250V, Category="Board-to-Board Connectors", ComponentLink1Description="Website Link", ComponentLink1URL=https://www.we-online.com/redexpert/article/613040243121?ad, ComponentLink2Description="Datasheet Link", ComponentLink2URL=https://www.we-online.com/redexpert/spec/613040243121?ad, Gender="Socket Header", Manufacturer Part Number=613040243121, Match Code=WR-PHD, Mount="Through Hole", Number of Pins=40, Number of Rows=2, Orientation=Angled, Packaging=Tray, Pitch=2.54mm
L1: library part 784773147, "WE-PD2A SMT Power Inductor, size 4532, 3.3µH, 2A, 3.3Ω", Case/Size Code=4532, DC Resistance=0.523Ω, DC Resistance Max=0.844Ω, Inductance=47µH, Manufacturer="Wurth Elektronik", Operating Temperature Max=125°C, Operating Temperature Min=-40°C, Rated Current=0.68A, Rated Voltage=80VDC, Saturation Current=0.77A, Self Resonant Frequency=12MHz, Automotive=Yes, Category="Single Coil Power Inductors", ComponentLink1Description="Website Link", ComponentLink1URL=https://www.we-online.com/redexpert/article/784773147?ad, ComponentLink2Description="Datasheet Link", ComponentLink2URL=https://www.we-online.com/redexpert/spec/784773147?ad, Height=3.2mm, Length=4.5mm, Manufacturer Part Number=784773147, Match Code=WE-PD2A, Mount="Surface Mount", Packaging="Tape and Reel", Width=4mm
P1: "TSM - Samtec 2.54mm Single Row Vertical Surface Mount Header 5.84mm Post Height (01) - Fast Stock", Package=None, Check_prices=https://www.snapeda.com/parts/TSM-102-01-L-SV/Samtec+Inc./view-part/?ref=eda, MF=Samtec, MP=TSM-102-01-L-SV, SnapEDA_Link=https://www.snapeda.com/parts/TSM-102-01-L-SV/Samtec+Inc./view-part/?ref=snap
Q1 Q2 Q3 Q4 Q5 Q6 Q7 Q8: "N-Channel 50V 220mA (Ta) 360mW (Ta) Surface Mount SOT-23-3", Package="SOT-23 ON Semiconductor", Availability=Good, Check_prices=https://www.snapeda.com/parts/BSS138/ON%20Semiconductor/view-part/4794929/?ref=eda, MF="ON Semiconductor", MP=BSS138, Price=None, Purchase-URL=https://pricing.snapeda.com/search/part/BSS138/?ref=eda, SnapEDA_Link=https://www.snapeda.com/parts/BSS138/ON%20Semiconductor/view-part/4794929/?ref=snap
R1 R2 R3 R4 R5 R6 R7 R8 R9 R10 R11 R12 R13 R14 R15 R16 R17 R18 R19 R20 R21 R22 R23 R24 R25 R26 R27 R28 R29 R30 R31 R32 R33 R34 R35 R36 R37 R38 R39 R40 R41 R42 R43 R44 R45 R46 R47 R48 R49 R50 R51 R52 R53 R54 R55 R56 R57 R58 R59 R60 R61 R62 R63 R64 R65 R66 R67 R68 R69 R70 R71 R72 R73 R74 R75 R76 R77 R78 R79 R80 R81 R82 R83 R84 R85 R86 R87 R88 R89 R90 R91 R92 R93: library part 580060716001, "WRIS-PSMB Metal Plate Resistor, SMT, size 0603, 0.33W, 5mΩ, +/-1%", Case/Size Code=0603, Manufacturer="Wurth Elektronik", Operating Temperature Max=155°C, Operating Temperature Min=-55°C, Rated Current=8.12A, Rated Power=0.33W, Resistance=5mΩ, Resistance Tolerance=+/-1%, Temperature Coefficient of Resistance=+/-100ppm/°C, Category="Metal Plate Resistors", ComponentLink1Description="Website Link", ComponentLink1URL=https://www.we-online.com/redexpert/article/580060716001?ad, ComponentLink2Description="Datasheet Link", ComponentLink2URL=https://www.we-online.com/redexpert/spec/580060716001?ad, Height=0.35mm, Length=1.6mm, Manufacturer Part Number=580060716001, Match Code=WRIS-PSMB, Mount="Surface Mount", Packaging="Tape and Reel", Technical Reference=MB0603R005F103KAATP0000, Width=0.8mm
S1 U6 U8 U9 U10 U11 U12 U13 U15 U17 U18: Package=None, Availability=Unavailable, Price=None
  S1: MP=JS202011SCQN
  U6 U8 U9 U10 U11 U12 U13 U15 U17 U18: MP=OPA2227UA
U1: "SX1308 - Transceiver; LoRaÂ® Evaluation Board", Package="- Semtech Corporation", Availability="In Stock", Check_prices=https://www.snapeda.com/parts/SX1308/Semtech+Corporation/view-part/?ref=eda, MF="Semtech Corporation", MP=SX1308, Price=None, Purchase-URL=https://pricing.snapeda.com/search/part/SX1308/?ref=eda, SnapEDA_Link=https://www.snapeda.com/parts/SX1308/Semtech+Corporation/view-part/?ref=snap
U2: "Ground Reference (Virtual) Voltage Reference IC Adjustable 2V 20 VV Â±1% 20 mA 8-PDIP", Package=None, Check_prices=https://www.snapeda.com/parts/TLE2426/Texas+Instruments/view-part/?ref=eda, MF="Texas Instruments", MP=TLE2426, SnapEDA_Link=https://www.snapeda.com/parts/TLE2426/Texas+Instruments/view-part/?ref=snap
U3: library part AMS1117-5.0, "1A LOW DROPOUT VOLTAGE REGULATOR", Package="SOT-223 Seeed Technology", Availability="Not in stock", Check_prices=https://www.snapeda.com/parts/AMS1117-5.0/ams/view-part/?ref=eda, MF=ams, MP=AMS1117-5.0, Price=None, SnapEDA_Link=https://www.snapeda.com/parts/AMS1117-5.0/ams/view-part/?ref=snap
U4 U5 U7: "Precision, 130-dB CMRR, 700-A, Low-Power, Instrumentation Amplifier 8-SOIC -40 to 125", Package="SOIC-8 Texas Instruments", Availability=Good, MF="Texas Instruments", MP=INA128UA/2K5, Price=None, Purchase-URL=https://pricing.snapeda.com/search/part/INA128UA/2K5/?ref=eda, SnapEDA_Link=https://www.snapeda.com/parts/INA128UA/2K5/Texas%20Instruments/view-part/1191532/?ref=snap
U14: "2 Circuit IC Switch 4:1 150Ohm 16-SO", Package="SO16-16 Nexperia USA Inc.", Availability=Good, Check_prices=https://www.snapeda.com/parts/74HC4052D,653/Nexperia/view-part/32196/?ref=eda, MF="Nexperia USA", MP=74HC4052D,653, Price=None, Purchase-URL=https://pricing.snapeda.com/search/part/74HC4052D,653/?ref=eda, SnapEDA_Link=https://www.snapeda.com/parts/74HC4052D,653/Nexperia/view-part/32196/?ref=snap

## Nets (pads, with @x,y where several pads share a name; then routed paths per layer and width w, separated by ;. In a path a pad name is that pad's centre, name@x,y a point inside that pad or via, vN(x,y) a via of type N, cw(c..) or ccw(c..) an arc to the next point about the centre after c; other vN are vias at no path point)
3V3: C8.2 C55.2 C56.2 Q1.1 Q2.1 Q3.1 Q4.1 Q5.1 Q6.1 Q7.1 Q8.1 R6.2 R65.2 R68.2 R70.2 R72.2 R75.2 R78.2 R81.2 R83.2 U3.2 U3.4 U19.8
3V5: C5.1 C6.1 C11.2 C12.2 C48.1 R44.1 R45.1 R48.1 R49.1 R52.1 R53.1 R59.1 R76.1 R90.2 R92.2 R93.2 U2.1 U4.5 U5.5 U6.3 U6.5 U7.5 U13.3 U13.6 U14.15 U16.7
7V: C4.1 C5.2 C6.2 C7.2 C9.1 C31.1 C32.1 C35.1 C36.1 C38.2 C39.2 C40.2 C41.2 C42.2 C44.2 C45.2 C47.2 C54.2 D1.2 D8.1 D9.1 D10.1 D11.1 D12.1 D13.1 D14.1 D15.1 D16.1 D17.1 R1.2 R5.2 R11.1 R12.1 R17.1 R18.1 R23.1 R24.1 R28.1 R31.1 R34.1 R64.2 R66.2 R69.2 R71.2 R73.2 R77.2 R80.2 R82.2 U2.3 U2.4 U3.3 U4.7 U5.7 U6.8 U7.7 U8.8 U9.8 U10.8 U11.8 U12.8 U13.8 U14.16 U15.8 U16.24 U17.8 U18.8
"-V_I / 2": R38.1 TP1.1 U4.6 U14.12
"-V_II / 2": R40.1 TP2.1 U5.6 U16.9
AMUX1_7_EN: Q1.3 R64.1 U14.6
AMUX1_7_S0: Q2.3 R66.1 U14.10
AMUX1_7_S1: Q3.3 R69.1 U14.9
AMUX2_7_EN: Q4.3 R71.1 U16.15
AMUX2_7_S0: Q5.3 R73.1 U16.10
AMUX2_7_S1: Q6.3 R77.1 U16.11
AMUX2_7_S2: Q7.3 R80.1 U16.14
AMUX2_7_S3: Q8.3 R82.1 U16.13
GND: C1.2 C2.2 C3.2 C4.2 C7.1 C8.1 C9.2 C10.1 C11.1 C12.1 C15.2 C16.2 C19.2 C20.2 C23.2 C24.2 C26.2 C28.2 C30.2 C31.2 C32.2 C35.2 C36.2 C38.1 C39.1 C40.1 C41.1 C42.1 C44.1 C45.1 C47.1 C54.1 C55.1 C56.1 D4.C D5.C D6.C D7.C D8.2 D9.2 D10.2 D11.2 D12.2 D13.2 D14.2 D15.2 D16.2 D17.2 J5.6 J5.9 J5.14 J5.20 J5.25 P1.2 R2.1 R9.2 R10.2 R15.2 R16.2 R21.2 R22.2 R27.2 R30.2 R33.2 U1.2 U2.2 U2.5 U2.6 U2.7 U3.1 U4.4 U5.4 U6.4 U7.4 U8.4 U9.4 U10.4 U11.4 U12.4 U13.4 U14.7 U14.8 U15.4 U16.12 U17.4 U18.4 U19.3 U19.4
LA: J1.1 R7.2
LL: J1.2 R19.2
NetC10_2: C10.2 U2.8
NetC13_1: C13.1 C15.1 D8.3 R7.1
NetC14_1: C14.1 C16.1 D9.3 R8.1
NetC14_2: C14.2 R10.1 R12.2 U8.3
NetC17_1: C17.1 C19.1 D10.3 R13.1
NetC18_1: C18.1 C20.1 D11.3 R14.1
NetC18_2: C18.2 R16.1 R18.2 U8.5
NetC21_1: C21.1 C23.1 D12.3 R19.1
NetC22_1: C22.1 C24.1 D13.3 R20.1
NetC22_2: C22.2 R22.1 R24.2 U9.3
NetC25_1: C25.1 C26.1 D14.3 R25.1
NetC25_2: C25.2 R27.1 R28.2 U9.5
NetC27_1: C27.1 C28.1 D16.3 R29.1
NetC27_2: C27.2 R30.1 R31.2 U10.3
NetC29_1: C29.1 C30.1 D17.3 R32.1
NetC29_2: C29.2 R33.1 R34.2 U10.5
NetC43_1: C43.1 R61.2
NetC43_2: C43.2 D15.3 R26.1 R62.2 TP13.1 U13.1
NetC46_2: C46.2 R84.2 R85.1
NetC48_2: C48.2 R85.2 U15.5
NetC49_1: C49.1 C50.1 R91.2 U17.6 U17.7
NetC49_2: C49.2 C50.2 R86.1 R87.2
NetC51_1: C51.1 C52.2 R91.1
NetC52_1: C52.1 R87.1 U17.3
NetC53_2: C53.2 R93.1 U18.5
NetD1_1: D1.1 L1.2 U1.1
NetD2_2: D2.2 S1.1 S1.6
NetD3_2: D3.2 S1.3 S1.4
NetD4_A: D4.A R3.1
NetD5_A: D5.A R4.1
NetD6_A: D6.A R5.1
NetD7_A: D7.A R6.1
NetJ5_19: J5.19 U19.5
NetJ5_21: J5.21 U19.6
NetJ5_23: J5.23 U19.7
NetJ5_26: J5.26 U19.1
NetJ5_29: J5.29 Q8.2 R83.1
NetJ5_31: J5.31 Q7.2 R81.1
NetJ5_33: J5.33 Q6.2 R78.1
NetJ5_35: J5.35 Q5.2 R75.1
NetJ5_36: J5.36 Q3.2 R70.1
NetJ5_37: J5.37 Q4.2 R72.1
NetJ5_38: J5.38 Q2.2 R68.1
NetJ5_40: J5.40 Q1.2 R65.1
NetR1_1: R1.1 R2.2 U1.3
NetR35_1: R35.1 U4.1
NetR35_2: R35.2 U4.8
NetR36_1: R36.1 U5.1
NetR36_2: R36.2 U5.8
NetR37_1: R37.1 U7.1
NetR37_2: R37.2 U7.8
NetR38_2: R38.2 R39.1 U6.2
NetR39_2: R39.2 TP3.1 U6.1 U14.14
NetR40_2: R40.2 R41.1 U6.6
NetR41_2: R41.2 TP5.1 U6.7 U16.8
NetR42_1: R42.1 R44.2 U8.2
NetR42_2: R42.2 TP6.1 U8.1 U16.5
NetR43_1: R43.1 R45.2 U8.6
NetR43_2: R43.2 TP7.1 U8.7 U16.4
NetR46_1: R46.1 R48.2 U9.2
NetR46_2: R46.2 TP8.1 U9.1 U16.3
NetR47_1: R47.1 R49.2 U9.6
NetR47_2: R47.2 TP9.1 U9.7 U16.2
NetR50_1: R50.1 R52.2 U10.2
NetR50_2: R50.2 TP10.1 U10.1 U16.23
NetR51_1: R51.1 R53.2 U10.6
NetR51_2: R51.2 TP11.1 U10.7 U16.22
NetR54_1: R54.1 U11.1 U11.2
NetR54_2: R54.2 R55.2 R57.2 U12.5
NetR55_1: R55.1 U11.6 U11.7
NetR56_1: R56.1 R58.2 U13.5
NetR56_2: R56.2 TP12.1 U13.7 U14.11
NetR57_1: R57.1 U12.1 U12.2
NetR59_2: R59.2 R60.1 U12.6
NetR61_1: R61.1 R62.1 R63.1 U13.2
NetR67_1: R67.1 U14.13
NetR67_2: R67.2 R79.2 U15.3
NetR74_1: R74.1 R76.2 U15.2
NetR74_2: R74.2 R84.1 TP14.1 U15.1
NetR79_1: R79.1 U16.1
NetR88_2: R88.2 R90.1 U15.6
NetR89_1: R89.1 TP16.1 U17.1 U17.2 U19.2
NetR89_2: R89.2 R92.1 U17.5
NetTP4_1: TP4.1 U7.6 U16.6
RA: J1.5 R13.2
RL: J3.2 R26.2
V1: J2.1 R8.2
V2: J2.5 R14.2
V3: J2.2 R20.2
V4: J4.1 R25.2
V5: J4.5 R29.2
V6: J4.2 R32.2
V_BAT: D3.1 P1.1 R4.2
V_CT: R58.1 R60.2 R63.2 U12.7
V_HPF_OUT: C51.2 R86.2 TP17.1 U18.6 U18.7
V_JET_5V: D2.1 J5.2 J5.4 R3.2
V_LA: C13.2 C33.1 C37.1 R9.1 R11.2 U4.2 U7.2 U11.3
V_LL: C21.2 C34.1 C37.2 R21.1 R23.2 U5.2 U7.3 U12.3
V_LPF_OUT: C46.1 C53.1 R88.1 TP15.1 U15.7
V_POW: C1.1 C2.1 C3.1 L1.1 S1.2 S1.5 U1.4 U1.5
V_RA: C17.2 C33.2 C34.2 R15.1 R17.2 U4.3 U5.3 U11.5
pads on no net: J1.3 J1.4 J2.3 J2.4 J3.1 J3.3 J3.4 J3.5 J4.3 J4.4 J5.1 J5.3 J5.5 J5.7 J5.8 J5.10 J5.11 J5.12 J5.13 J5.15 J5.16 J5.17 J5.18 J5.22 J5.24 J5.27 J5.28 J5.30 J5.32 J5.34 J5.39 U1.6 U14.1 U14.2 U14.3 U14.4 U14.5 U16.16 U16.17 U16.18 U16.19 U16.20 U16.21 U18.1 U18.2 U18.3

## Keep-outs
Keep-Out Layer:
  the board outline again, w5

## Text inside footprints (layer, text, board x,y; h text height)
C1: Top Overlay "+" at 1832.83,487.01 h48 r90
C2: Top Overlay "+" at 1602.83,487.01 h48 r90
C9: Top Overlay "+" at 330,490 h48 r90